# Altium PCB Sitara_Project_Rev_A_PCB.PcbDoc (part 6 of 9)
Units mm, origin at the board's own origin, x right, y up, seen from the top; angles counter-clockwise.
Board outline 120 x 85 mm, 8 copper layers (L1 (Sig), L2 (GND), L3 (PWR), L4 (Sig), L5 (GND), L6 (Sig), L7 (GND), L8 (Sig)), stack 1.188 mm thick; 458 components, 357 nets, 1916 pads, 1164 vias.
Unrouted connection lines stored in the file: 516.
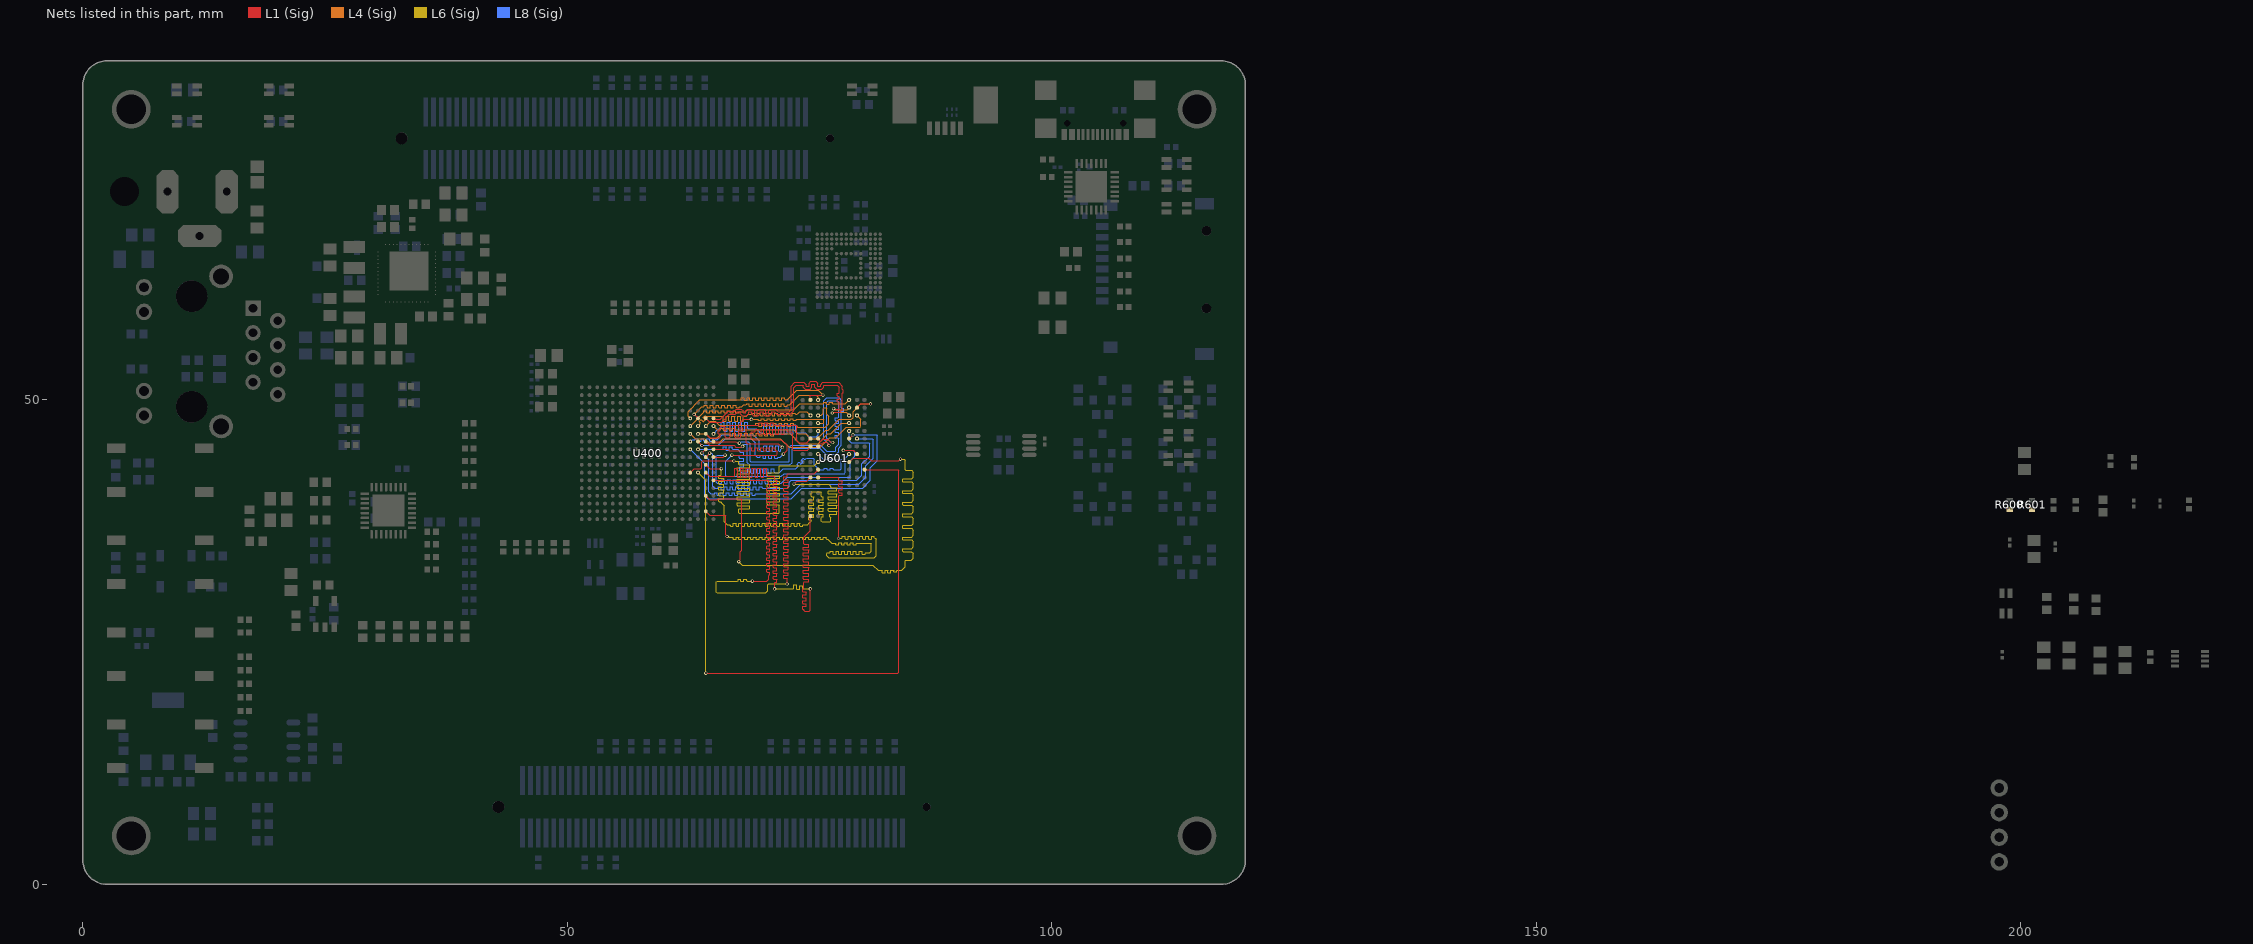
[diagram p9: the nets of this part, all layers, seen from the top]

## Via types
v1: diameter 0.35, hole 0.2, L1 (Sig) to L8 (Sig), tented both sides, 846 vias
v2: diameter 0.45, hole 0.3, L1 (Sig) to L8 (Sig), tented both sides, 302 vias
v3: diameter 0.45/0.45/0.45/0.45/0.45/0.45/0.45/0.45 (per signal layer), hole 0.3, L1 (Sig) to L8 (Sig), tented both sides, 16 vias

## Nets (pads, with @x,y where several pads share a name; then routed paths per layer and width w, separated by ;. In a path a pad name is that pad's centre, name@x,y a point inside that pad or via, vN(x,y) a via of type N, cw(c..) or ccw(c..) an arc to the next point about the centre after c; other vN are vias at no path point) (continued)
DDR_CK_P: U400.D2 U601.J7 | length 61.5
  L1 (Sig) w0.1: U400.D2@64.3,40.1 64.7,39.7 65.5,39.7 65.6,39.8 67.941,39.8 68,39.741 68,34.502 67.85,34.352 67.85,33.484 67.7,33.334 v1(67.7,33.3) ; U601.J7@79.1,43.6 79.5,44 81.1,44 81.362,43.738 84.22,43.738 84.371,43.889 v1(84.404,43.889)
  L6 (Sig) w0.1: v1(67.7,33.3) 68.052,32.948 81.552,32.948 82.093,32.407 82.1,32.4 82.443,32.4 82.502,32.341 82.502,32.168 82.517,32.153 82.787,32.153 82.802,32.168 82.802,32.39 82.817,32.405 83.087,32.405 83.102,32.39 83.102,32.168 83.117,32.153 83.387,32.153 83.402,32.168 83.402,32.39 83.417,32.405 83.687,32.405 83.702,32.39 83.702,32.257 83.717,32.242 83.987,32.242 84.002,32.257 84.002,32.341 84.061,32.4 84.526,32.4 84.55,32.424 84.9,32.774 84.9,33.1 84.9,33.389 84.959,33.447 85.524,33.447 85.715,33.638 85.715,34.157 85.524,34.347 84.665,34.347 84.65,34.362 84.65,34.632 84.665,34.647 85.548,34.647 85.739,34.838 85.739,35.357 85.548,35.547 84.665,35.547 84.65,35.562 84.65,35.832 84.665,35.847 85.548,35.847 85.739,36.038 85.739,36.557 85.548,36.747 84.665,36.747 84.65,36.762 84.65,37.032 84.665,37.047 85.548,37.047 85.739,37.238 85.739,37.757 85.548,37.947 84.665,37.947 84.65,37.962 84.65,38.232 84.665,38.247 85.548,38.247 85.739,38.438 85.739,38.957 85.548,39.147 84.665,39.147 84.65,39.162 84.65,39.432 84.665,39.447 85.548,39.447 85.739,39.638 85.739,40.157 85.548,40.347 84.665,40.347 84.65,40.362 84.65,40.632 84.665,40.647 85.548,40.647 85.739,40.838 85.739,41.357 85.548,41.547 84.665,41.547 84.65,41.562 84.65,41.832 84.665,41.847 85.548,41.847 85.739,42.038 85.739,42.557 85.548,42.747 84.959,42.747 84.9,42.806 84.9,42.944 84.9,43.777 84.789,43.889 v1(84.404,43.889)
DDR_CKE: R601.1 U400.G3 U601.K9 | length 65.3
  L1 (Sig) w0.1: v1(64.3,21.8) 84.1,21.8 84.2,21.9 84.2,42.741 84.141,42.8 U601.K9@80.7,42.8
  L6 (Sig) w0.1: v1(63.5,42.5) 64.3,41.7 v1(64.3,21.8)
DDR_DQ0: U400.M3 U601.D7 | length 20.7
  L4 (Sig) w0.1: v1(63.5,46.5) 64.3,46.5 64.767,46.033 65.433,46.033 65.9,46.5 66.4,46.5 66.75,46.5 66.809,46.441 66.809,46.322 66.824,46.307 67.094,46.307 67.109,46.322 67.109,46.534 67.124,46.549 67.394,46.549 67.409,46.534 67.409,46.322 67.424,46.307 67.694,46.307 67.709,46.322 67.709,46.534 67.724,46.549 67.994,46.549 68.009,46.534 68.009,46.322 68.024,46.307 68.294,46.307 68.309,46.322 68.309,46.534 68.324,46.549 68.594,46.549 68.609,46.534 68.609,46.322 68.624,46.307 68.894,46.307 68.909,46.322 68.909,46.534 68.924,46.549 69.194,46.549 69.209,46.534 69.209,46.322 69.224,46.307 69.494,46.307 69.509,46.322 69.509,46.534 69.524,46.549 69.794,46.549 69.809,46.534 69.809,46.322 69.824,46.307 70.094,46.307 70.109,46.322 70.109,46.534 70.124,46.549 70.394,46.549 70.409,46.534 70.409,46.322 70.424,46.307 70.694,46.307 70.709,46.322 70.709,46.534 70.724,46.549 70.994,46.549 71.009,46.534 71.009,46.322 71.024,46.307 71.294,46.307 71.309,46.322 71.309,46.441 71.367,46.5 71.614,46.5 73,46.5 74,45.5 75.9,45.5 76.9,46.5 77.2,46.5 78.3,47.6 v1(79.1,47.6)
DDR_DQ1: U400.M4 U601.C8 | length 20.7
  L4 (Sig) w0.1: v1(62.7,46.5) 63.2,46 64.2,46 64.6,45.6 65.7,45.6 66.1,46 72,46 72.9,45.1 76.1,45.1 77.1,46.1 77.7,46.1 78.8,47.2 80.241,47.2 80.3,47.259 80.3,48 v1(79.9,48.4)
DDR_DQ2: U400.N1 U601.B8 | length 21
  L1 (Sig) w0.1: U601.B8@79.9,49.2 80.3,49.6 v1(81.3,49.6)
  L4 (Sig) w0.1: v1(65.1,47.3) 65.5,46.9 65.7,46.9 65.75,46.9 65.809,46.959 65.809,47.043 65.824,47.058 66.094,47.058 66.109,47.043 66.109,46.901 66.124,46.886 66.394,46.886 66.409,46.901 66.409,47.043 66.424,47.058 66.694,47.058 66.709,47.043 66.709,46.901 66.724,46.886 66.994,46.886 67.009,46.901 67.009,47.043 67.024,47.058 67.294,47.058 67.309,47.043 67.309,46.959 67.367,46.9 67.914,46.9 73.4,46.9 73.8,46.5 74.6,46.5 75.1,46 75.806,46 76.67,46.864 76.923,46.864 78.059,48 79.333,48 79.5,48.167 79.5,48.8 80.3,49.6 v1(81.3,49.6)
DDR_DQ3: U400.N2 U601.C3 | length 20.8
  L4 (Sig) w0.1: v1(64.3,47.3) 64.8,47.8 65.3,47.8 65.7,47.4 69.358,47.4 69.408,47.4 69.467,47.459 69.467,47.588 69.482,47.603 69.752,47.603 69.767,47.588 69.767,47.272 69.782,47.257 70.052,47.257 70.067,47.272 70.067,47.588 70.082,47.603 70.352,47.603 70.367,47.588 70.367,47.272 70.382,47.257 70.652,47.257 70.667,47.272 70.667,47.588 70.682,47.603 70.952,47.603 70.967,47.588 70.967,47.272 70.982,47.257 71.252,47.257 71.267,47.272 71.267,47.588 71.282,47.603 71.552,47.603 71.567,47.588 71.567,47.272 71.582,47.257 71.852,47.257 71.867,47.272 71.867,47.588 71.882,47.603 72.152,47.603 72.167,47.588 72.167,47.272 72.182,47.257 72.452,47.257 72.467,47.272 72.467,47.588 72.482,47.603 72.752,47.603 72.767,47.588 72.767,47.272 72.782,47.257 73.052,47.257 73.067,47.272 73.067,47.588 73.082,47.603 73.352,47.603 73.367,47.588 73.367,47.459 73.425,47.4 73.597,47.4 73.6,47.4 73.8,47.2 76.648,47.2 77,47.552 77,48.3 76.8,48.5 76.8,49.141 76.741,49.2 76.5,49.2 76.4,49.1 76.4,48.6 76.2,48.4 v1(75.9,48.4)
DDR_DQ4: U400.N3 U601.C2 | length 20.7
  L4 (Sig) w0.1: v1(63.5,47.3) 63.7,47.5 63.735,47.535 63.735,47.618 63.611,47.743 63.611,47.764 63.802,47.955 63.823,47.955 64.019,47.759 64.04,47.759 64.231,47.95 64.231,47.971 64.035,48.167 64.035,48.188 64.226,48.379 64.247,48.379 64.372,48.255 64.455,48.255 64.5,48.3 64.509,48.3 65.682,48.3 66.032,48.3 66.09,48.241 66.09,47.834 66.105,47.819 66.375,47.819 66.39,47.834 66.39,48.287 66.405,48.302 66.675,48.302 66.69,48.287 66.69,47.834 66.705,47.819 66.975,47.819 66.99,47.834 66.99,48.287 67.005,48.302 67.275,48.302 67.29,48.287 67.29,47.834 67.305,47.819 67.575,47.819 67.59,47.834 67.59,48.287 67.605,48.302 67.875,48.302 67.89,48.287 67.89,47.834 67.905,47.819 68.175,47.819 68.19,47.834 68.19,48.241 68.249,48.3 68.427,48.3 68.5,48.3 68.7,48.5 68.927,48.5 68.977,48.5 69.036,48.559 69.036,48.63 69.051,48.645 69.321,48.645 69.336,48.63 69.336,48.393 69.351,48.378 69.621,48.378 69.636,48.393 69.636,48.63 69.651,48.645 69.921,48.645 69.936,48.63 69.936,48.393 69.951,48.378 70.221,48.378 70.236,48.393 70.236,48.63 70.251,48.645 70.521,48.645 70.536,48.63 70.536,48.393 70.551,48.378 70.821,48.378 70.836,48.393 70.836,48.63 70.851,48.645 71.121,48.645 71.136,48.63 71.136,48.393 71.151,48.378 71.421,48.378 71.436,48.393 71.436,48.63 71.451,48.645 71.721,48.645 71.736,48.63 71.736,48.393 71.751,48.378 72.021,48.378 72.036,48.393 72.036,48.63 72.051,48.645 72.321,48.645 72.336,48.63 72.336,48.393 72.351,48.378 72.621,48.378 72.636,48.393 72.636,48.63 72.651,48.645 72.921,48.645 72.936,48.63 72.936,48.393 72.951,48.378 73.221,48.378 73.236,48.393 73.236,48.63 73.251,48.645 73.521,48.645 73.536,48.63 73.536,48.559 73.594,48.5 73.7,48.5 73.77,48.57 74,48.8 74.7,48.8 v1(75.1,48.4)
DDR_DQ5: U400.N4 U601.A7 | length 20.6
  L4 (Sig) w0.1: v1(62.7,47.3) 64.06,48.66 64.11,48.71 64.11,48.871 64.125,48.886 64.395,48.886 64.41,48.871 64.41,48.669 64.425,48.654 64.695,48.654 64.71,48.669 64.71,48.871 64.725,48.886 64.995,48.886 65.01,48.871 65.01,48.669 65.025,48.654 65.295,48.654 65.31,48.669 65.31,48.871 65.325,48.886 65.595,48.886 65.61,48.871 65.61,48.669 65.625,48.654 65.895,48.654 65.91,48.669 65.91,48.871 65.925,48.886 66.195,48.886 66.21,48.871 66.21,48.669 66.225,48.654 66.495,48.654 66.51,48.669 66.51,48.871 66.525,48.886 66.795,48.886 66.81,48.871 66.81,48.669 66.825,48.654 67.095,48.654 67.11,48.669 67.11,48.871 67.125,48.886 67.395,48.886 67.41,48.871 67.41,48.669 67.425,48.654 67.695,48.654 67.71,48.669 67.71,48.741 67.769,48.8 67.921,48.8 68.4,48.8 68.6,49 73.4,49 74,49.6 76.35,49.6 76.4,49.6 76.459,49.659 76.459,49.729 76.474,49.744 76.744,49.744 76.759,49.729 76.759,49.579 76.774,49.564 77.044,49.564 77.059,49.579 77.059,49.729 77.074,49.744 77.344,49.744 77.359,49.729 77.359,49.659 77.417,49.6 77.582,49.6 78.7,49.6 v1(79.1,50)
DDR_DQ6: U400.P3 U601.A3 | length 20.7
  L1 (Sig) w0.1: v1(63.1,48.5) U400.P3@63.5,48.1
  L4 (Sig) w0.1: v1(63.1,48.5) 63.9,49.3 64.05,49.3 64.1,49.3 64.158,49.359 64.158,49.448 64.173,49.463 64.443,49.463 64.458,49.448 64.458,49.219 64.473,49.204 64.743,49.204 64.758,49.219 64.758,49.448 64.773,49.463 65.043,49.463 65.058,49.448 65.058,49.219 65.073,49.204 65.343,49.204 65.358,49.219 65.358,49.448 65.373,49.463 65.643,49.463 65.658,49.448 65.658,49.219 65.673,49.204 65.943,49.204 65.958,49.219 65.958,49.448 65.973,49.463 66.243,49.463 66.258,49.448 66.258,49.219 66.273,49.204 66.543,49.204 66.558,49.219 66.558,49.448 66.573,49.463 66.843,49.463 66.858,49.448 66.858,49.219 66.873,49.204 67.143,49.204 67.158,49.219 67.158,49.448 67.173,49.463 67.443,49.463 67.458,49.448 67.458,49.219 67.473,49.204 67.743,49.204 67.758,49.219 67.758,49.241 67.817,49.3 67.923,49.3 68,49.3 68.2,49.5 68.4,49.5 68.45,49.5 68.509,49.559 68.509,49.595 68.524,49.61 68.794,49.61 68.809,49.595 68.809,49.364 68.824,49.349 69.094,49.349 69.109,49.364 69.109,49.595 69.124,49.61 69.394,49.61 69.409,49.595 69.409,49.364 69.424,49.349 69.694,49.349 69.709,49.364 69.709,49.595 69.724,49.61 69.994,49.61 70.009,49.595 70.009,49.364 70.024,49.349 70.294,49.349 70.309,49.364 70.309,49.595 70.324,49.61 70.594,49.61 70.609,49.595 70.609,49.364 70.624,49.349 70.894,49.349 70.909,49.364 70.909,49.595 70.924,49.61 71.194,49.61 71.209,49.595 71.209,49.364 71.224,49.349 71.494,49.349 71.509,49.364 71.509,49.595 71.524,49.61 71.794,49.61 71.809,49.595 71.809,49.364 71.824,49.349 72.094,49.349 72.109,49.364 72.109,49.595 72.124,49.61 72.394,49.61 72.409,49.595 72.409,49.364 72.424,49.349 72.694,49.349 72.709,49.364 72.709,49.441 72.767,49.5 72.951,49.5 73.951,50.5 75.7,50.5 75.9,50.3 v1(75.9,50)
DDR_DQ7: U400.P4 U601.A2 | length 21.1
  L1 (Sig) w0.1: U601.A2@75.1,50 75.1,50.441 75.159,50.5 v1(76.4,50.5)
  L4 (Sig) w0.1: v1(62.7,48.1) 62.5,48.3 62.5,48.8 63.7,50 67.849,50 67.899,50 67.958,50.059 67.958,50.2 67.973,50.215 68.243,50.215 68.258,50.2 68.258,49.984 68.273,49.969 68.543,49.969 68.558,49.984 68.558,50.2 68.573,50.215 68.843,50.215 68.858,50.2 68.858,49.984 68.873,49.969 69.143,49.969 69.158,49.984 69.158,50.2 69.173,50.215 69.443,50.215 69.458,50.2 69.458,49.984 69.473,49.969 69.743,49.969 69.758,49.984 69.758,50.2 69.773,50.215 70.043,50.215 70.058,50.2 70.058,49.984 70.073,49.969 70.343,49.969 70.358,49.984 70.358,50.2 70.373,50.215 70.643,50.215 70.658,50.2 70.658,49.984 70.673,49.969 70.943,49.969 70.958,49.984 70.958,50.2 70.973,50.215 71.243,50.215 71.258,50.2 71.258,49.984 71.273,49.969 71.543,49.969 71.558,49.984 71.558,50.2 71.573,50.215 71.843,50.215 71.858,50.2 71.858,49.984 71.873,49.969 72.143,49.969 72.158,49.984 72.158,50.2 72.173,50.215 72.443,50.215 72.458,50.2 72.458,50.059 72.516,50 72.682,50 72.7,50 73.7,51 75.9,51 v1(76.4,50.5)
DDR_DQ8: U400.J1 U601.H8 | length 31.6
  L1 (Sig) w0.1: U400.J1@65.1,44.1 66.1,44.1 v1(66.3,44.3) ; v1(78.5,44.8) 79.5,44.8 U601.H8@79.9,44.4
  L8 (Sig) w0.1: v1(66.3,44.3) 65.459,44.3 65.4,44.241 65.4,41.5 65.5,41.4 65.605,41.4 65.882,41.4 65.941,41.459 65.941,41.721 65.956,41.736 66.226,41.736 66.241,41.721 66.241,41.378 66.256,41.363 66.526,41.363 66.541,41.378 66.541,41.721 66.556,41.736 66.826,41.736 66.841,41.721 66.841,41.378 66.856,41.363 67.126,41.363 67.141,41.378 67.141,41.721 67.156,41.736 67.426,41.736 67.441,41.721 67.441,41.378 67.456,41.363 67.726,41.363 67.741,41.378 67.741,41.721 67.756,41.736 68.026,41.736 68.041,41.721 68.041,41.378 68.056,41.363 68.326,41.363 68.341,41.378 68.341,41.721 68.356,41.736 68.626,41.736 68.641,41.721 68.641,41.378 68.656,41.363 68.926,41.363 68.941,41.378 68.941,41.721 68.956,41.736 69.226,41.736 69.241,41.721 69.241,41.378 69.256,41.363 69.526,41.363 69.541,41.378 69.541,41.721 69.556,41.736 69.826,41.736 69.841,41.721 69.841,41.378 69.856,41.363 70.126,41.363 70.141,41.378 70.141,41.721 70.156,41.736 70.426,41.736 70.441,41.721 70.441,41.378 70.456,41.363 70.726,41.363 70.741,41.378 70.741,41.721 70.756,41.736 71.026,41.736 71.041,41.721 71.041,41.378 71.056,41.363 71.326,41.363 71.341,41.378 71.341,41.721 71.356,41.736 71.626,41.736 71.641,41.721 71.641,41.459 71.699,41.4 72.049,41.4 72.1,41.4 72.7,42 79.141,42 79.2,42.059 79.2,43.7 79.7,44.2 79.7,44.6 79.5,44.8 v1(78.5,44.8)
DDR_DQ9: U400.K1 U601.H7 | length 31.3
  L1 (Sig) w0.1: U400.K1@65.1,44.9 66.6,44.9 66.737,44.763 68.658,44.763 68.708,44.763 68.766,44.822 68.766,45.031 68.781,45.046 69.051,45.046 69.066,45.031 69.066,44.776 69.081,44.761 69.351,44.761 69.366,44.776 69.366,45.031 69.381,45.046 69.651,45.046 69.666,45.031 69.666,44.776 69.681,44.761 69.951,44.761 69.966,44.776 69.966,45.031 69.981,45.046 70.251,45.046 70.266,45.031 70.266,44.776 70.281,44.761 70.551,44.761 70.566,44.776 70.566,45.031 70.581,45.046 70.851,45.046 70.866,45.031 70.866,44.776 70.881,44.761 71.151,44.761 71.166,44.776 71.166,45.031 71.181,45.046 71.451,45.046 71.466,45.031 71.466,44.822 71.525,44.763 71.615,44.763 71.62,44.763 71.678,44.705 71.678,44.378 71.6,44.3 v1(67,44.3)
  L8 (Sig) w0.1: v1(67,44.3) 66.361,43.661 66.361,42.159 66.42,42.1 72.1,42.1 72.4,42.4 78.641,42.4 78.7,42.459 78.7,44 v1(79.1,44.4)
DDR_DQ10: U400.K2 U601.F8 | length 31.5
  L1 (Sig) w0.1: v1(63.9,44.5) U400.K2@64.3,44.9
  L8 (Sig) w0.1: v1(63.9,44.5) 64.6,43.8 64.6,40.5 64.8,40.3 65.1,40.3 65.15,40.3 65.209,40.359 65.209,40.408 65.224,40.423 65.494,40.423 65.509,40.408 65.509,40.15 65.524,40.135 65.794,40.135 65.809,40.15 65.809,40.408 65.824,40.423 66.094,40.423 66.109,40.408 66.109,40.15 66.124,40.135 66.394,40.135 66.409,40.15 66.409,40.408 66.424,40.423 66.694,40.423 66.709,40.408 66.709,40.15 66.724,40.135 66.994,40.135 67.009,40.15 67.009,40.408 67.024,40.423 67.294,40.423 67.309,40.408 67.309,40.15 67.324,40.135 67.594,40.135 67.609,40.15 67.609,40.408 67.624,40.423 67.894,40.423 67.909,40.408 67.909,40.15 67.924,40.135 68.194,40.135 68.209,40.15 68.209,40.408 68.224,40.423 68.494,40.423 68.509,40.408 68.509,40.15 68.524,40.135 68.794,40.135 68.809,40.15 68.809,40.408 68.824,40.423 69.094,40.423 69.109,40.408 69.109,40.15 69.124,40.135 69.394,40.135 69.409,40.15 69.409,40.241 69.467,40.3 69.781,40.3 73.1,40.3 74.1,41.3 80.1,41.3 80.8,42 80.8,43.2 81.6,44 81.6,45.9 81.5,46 v1(79.9,46)
DDR_DQ11: U400.K3 U601.H3 | length 31.5
  L8 (Sig) w0.1: v1(63.5,44.9) 66,44.9 66.05,44.9 66.109,44.959 66.109,45.135 66.124,45.15 66.394,45.15 66.409,45.135 66.409,44.823 66.424,44.808 66.694,44.808 66.709,44.823 66.709,45.135 66.724,45.15 66.994,45.15 67.009,45.135 67.009,44.959 67.067,44.9 67.398,44.9 67.6,44.9 67.8,44.7 67.8,44.65 67.859,44.591 68.227,44.591 68.242,44.576 68.242,44.306 68.227,44.291 67.75,44.291 67.735,44.276 67.735,44.006 67.75,43.991 68.227,43.991 68.242,43.976 68.242,43.706 68.227,43.691 67.75,43.691 67.735,43.676 67.735,43.406 67.75,43.391 68.227,43.391 68.242,43.376 68.242,43.106 68.227,43.091 67.859,43.091 67.8,43.033 67.8,42.733 67.8,42.7 68,42.5 68.4,42.5 68.599,42.5 68.657,42.559 68.657,42.895 68.672,42.91 68.942,42.91 68.957,42.895 68.957,42.461 68.972,42.446 69.242,42.446 69.257,42.461 69.257,42.895 69.272,42.91 69.542,42.91 69.557,42.895 69.557,42.461 69.572,42.446 69.842,42.446 69.857,42.461 69.857,42.895 69.872,42.91 70.142,42.91 70.157,42.895 70.157,42.461 70.172,42.446 70.442,42.446 70.457,42.461 70.457,42.895 70.472,42.91 70.742,42.91 70.757,42.895 70.757,42.461 70.772,42.446 71.042,42.446 71.057,42.461 71.057,42.895 71.072,42.91 71.342,42.91 71.357,42.895 71.357,42.559 71.416,42.5 71.766,42.5 71.9,42.5 72.3,42.9 73.6,42.9 73.8,43.1 73.835,43.135 73.835,43.218 73.724,43.329 73.724,43.35 73.915,43.541 73.936,43.541 74.098,43.38 74.12,43.38 74.31,43.57 74.31,43.592 74.149,43.753 74.149,43.775 74.34,43.966 74.361,43.966 74.472,43.855 74.555,43.855 74.642,43.942 74.7,44 75.4,44 75.5,43.9 75.5,43.3 76,42.8 76.44,42.8 76.49,42.8 76.548,42.859 76.548,42.93 76.563,42.945 76.833,42.945 76.848,42.93 76.848,42.802 76.863,42.787 77.133,42.787 77.148,42.802 77.148,42.93 77.163,42.945 77.433,42.945 77.448,42.93 77.448,42.859 77.507,42.8 78.133,42.8 78.2,42.8 78.3,42.9 78.3,43.841 78.241,43.9 76.4,43.9 v1(75.9,44.4)
DDR_DQ12: U400.K4 U601.F7 | length 31.5
  L1 (Sig) w0.1: U601.F7@79.1,46 v1(79.5,46.4)
  L8 (Sig) w0.1: v1(62.7,44.9) 64.2,43.4 64.2,40.1 64.5,39.8 73.1,39.8 74.2,40.9 80.5,40.9 81.3,41.7 81.3,43 82,43.7 82,46.341 81.941,46.4 v1(79.5,46.4)
DDR_DQ13: U400.L3 U601.G2 | length 31.7
  L1 (Sig) w0.1: U400.L3@63.5,45.7 v1(63.9,45.3) ; v1(72.3,44.4) 72.7,44.8 72.7,45.3 72.1,45.9 69.1,45.9 69,46 69,46.641 69.059,46.7 69.3,46.7 69.35,46.7 69.409,46.759 69.409,46.935 69.424,46.95 69.694,46.95 69.709,46.935 69.709,46.465 69.724,46.45 69.994,46.45 70.009,46.465 70.009,46.935 70.024,46.95 70.294,46.95 70.309,46.935 70.309,46.465 70.324,46.45 70.594,46.45 70.609,46.465 70.609,46.935 70.624,46.95 70.894,46.95 70.909,46.935 70.909,46.465 70.924,46.45 71.194,46.45 71.209,46.465 71.209,46.935 71.224,46.95 71.494,46.95 71.509,46.935 71.509,46.465 71.524,46.45 71.794,46.45 71.809,46.465 71.809,46.935 71.824,46.95 72.094,46.95 72.109,46.935 72.109,46.465 72.124,46.45 72.394,46.45 72.409,46.465 72.409,46.935 72.424,46.95 72.694,46.95 72.709,46.935 72.709,46.759 72.767,46.7 72.834,46.7 73.1,46.7 73.3,46.5 73.3,44.859 73.359,44.8 74.8,44.8 74.895,44.895 74.895,44.906 75.1,45.111 U601.G2@75.1,45.2
  L8 (Sig) w0.1: v1(63.9,45.3) 65.6,45.3 66.3,46 69,46 69.4,45.6 69.4,44.3 69.6,44.1 69.8,44.1 69.85,44.1 69.909,44.159 69.909,44.281 69.924,44.296 70.194,44.296 70.209,44.281 70.209,43.997 70.224,43.982 70.494,43.982 70.509,43.997 70.509,44.281 70.524,44.296 70.794,44.296 70.809,44.281 70.809,43.997 70.824,43.982 71.094,43.982 71.109,43.997 71.109,44.281 71.124,44.296 71.394,44.296 71.409,44.281 71.409,43.997 71.424,43.982 71.694,43.982 71.709,43.997 71.709,44.041 71.767,44.1 72,44.1 v1(72.3,44.4)
DDR_DQ14: U400.L4 U601.F2 | length 31.6
  L1 (Sig) w0.1: v1(72.2,45.1) 72.184,45.1 71.784,45.5 68.6,45.5 68.5,45.6 68.5,47.341 68.559,47.4 69.7,47.4 69.75,47.4 69.809,47.459 69.809,47.635 69.824,47.65 70.094,47.65 70.109,47.635 70.109,47.383 70.124,47.368 70.394,47.368 70.409,47.383 70.409,47.635 70.424,47.65 70.694,47.65 70.709,47.635 70.709,47.383 70.724,47.368 70.994,47.368 71.009,47.383 71.009,47.635 71.024,47.65 71.294,47.65 71.309,47.635 71.309,47.459 71.367,47.4 71.909,47.4 73.641,47.4 73.7,47.341 73.7,45.8 73.9,45.6 74.7,45.6 U601.F2@75.1,46
  L8 (Sig) w0.1: v1(62.7,45.7) 62.9,45.9 63.1,45.9 63.15,45.9 63.209,45.959 63.209,45.992 63.224,46.007 63.494,46.007 63.509,45.992 63.509,45.772 63.524,45.757 63.794,45.757 63.809,45.772 63.809,45.992 63.824,46.007 64.094,46.007 64.109,45.992 64.109,45.772 64.124,45.757 64.394,45.757 64.409,45.772 64.409,45.992 64.424,46.007 64.694,46.007 64.709,45.992 64.709,45.772 64.724,45.757 64.994,45.757 65.009,45.772 65.009,45.992 65.024,46.007 65.294,46.007 65.309,45.992 65.309,45.959 65.367,45.9 65.5,45.9 66,46.4 69.2,46.4 69.8,45.8 69.8,44.9 70,44.7 70.2,44.7 70.25,44.7 70.309,44.759 70.309,45.233 70.324,45.248 70.594,45.248 70.609,45.233 70.609,44.692 70.624,44.677 70.894,44.677 70.909,44.692 70.909,45.233 70.924,45.248 71.194,45.248 71.209,45.233 71.209,44.692 71.224,44.677 71.494,44.677 71.509,44.692 71.509,45.233 71.524,45.248 71.794,45.248 71.809,45.233 71.809,44.759 71.867,44.7 71.992,44.7 72.051,44.759 72.051,44.883 72.2,45.032 v1(72.2,45.1)
DDR_DQ15: U400.M1 U601.E3 | length 31.4
  L8 (Sig) w0.1: v1(65.1,46.5) 65.6,47 65.8,47 65.85,47 65.909,47.059 65.909,47.675 65.924,47.69 66.194,47.69 66.209,47.675 66.209,46.765 66.224,46.75 66.494,46.75 66.509,46.765 66.509,47.675 66.524,47.69 66.794,47.69 66.809,47.675 66.809,46.765 66.824,46.75 67.094,46.75 67.109,46.765 67.109,47.675 67.124,47.69 67.394,47.69 67.409,47.675 67.409,46.765 67.424,46.75 67.694,46.75 67.709,46.765 67.709,47.675 67.724,47.69 67.994,47.69 68.009,47.675 68.009,46.765 68.024,46.75 68.294,46.75 68.309,46.765 68.309,47.675 68.324,47.69 68.594,47.69 68.609,47.675 68.609,47.059 68.667,47 68.742,47 69.5,47 69.9,46.6 70.2,46.6 70.25,46.6 70.309,46.659 70.309,47.437 70.324,47.452 70.594,47.452 70.609,47.437 70.609,46.525 70.624,46.51 70.894,46.51 70.909,46.525 70.909,47.437 70.924,47.452 71.194,47.452 71.209,47.437 71.209,46.525 71.224,46.51 71.494,46.51 71.509,46.525 71.509,47.437 71.524,47.452 71.794,47.452 71.809,47.437 71.809,46.525 71.824,46.51 72.094,46.51 72.109,46.525 72.109,47.437 72.124,47.452 72.394,47.452 72.409,47.437 72.409,46.525 72.424,46.51 72.694,46.51 72.709,46.525 72.709,47.437 72.724,47.452 72.994,47.452 73.009,47.437 73.009,46.525 73.024,46.51 73.294,46.51 73.309,46.525 73.309,47.437 73.324,47.452 73.594,47.452 73.609,47.437 73.609,46.659 73.667,46.6 73.81,46.6 74.549,46.6 74.949,46.2 75.7,46.2 75.9,46.4 v1(75.9,46.8)
DDR_DQM0: U400.M2 U601.D3 | length 22.8
  L1 (Sig) w0.1: U400.M2@64.3,46.5 64.7,46.1 65.7,46.1 65.8,46.2 65.8,46.4 65.8,46.45 65.741,46.509 65.596,46.509 65.581,46.524 65.581,46.794 65.596,46.809 65.741,46.809 65.8,46.867 65.8,47.2 65.9,47.3 66.2,47.3 66.3,47.2 66.3,46.2 66.4,46.1 66.7,46.1 66.8,46.2 66.8,47.341 66.859,47.4 67.241,47.4 67.3,47.341 67.3,46.2 67.4,46.1 67.8,46.1 67.9,46.2 67.9,46.41 67.9,46.46 67.841,46.518 67.723,46.518 67.708,46.533 67.708,46.803 67.723,46.818 68.09,46.818 68.105,46.833 68.105,47.103 68.09,47.118 67.723,47.118 67.708,47.133 67.708,47.403 67.723,47.418 67.841,47.418 67.9,47.477 67.9,47.553 67.9,47.7 68.2,48 v1(69,48)
  L4 (Sig) w0.1: v1(69,48) 69.332,48 69.682,48 69.74,47.941 69.74,47.915 69.755,47.9 70.025,47.9 70.04,47.915 70.04,48.05 70.055,48.065 70.325,48.065 70.34,48.05 70.34,47.915 70.355,47.9 70.625,47.9 70.64,47.915 70.64,48.05 70.655,48.065 70.925,48.065 70.94,48.05 70.94,47.915 70.955,47.9 71.225,47.9 71.24,47.915 71.24,48.05 71.255,48.065 71.525,48.065 71.54,48.05 71.54,47.915 71.555,47.9 71.825,47.9 71.84,47.915 71.84,48.05 71.855,48.065 72.125,48.065 72.14,48.05 72.14,47.915 72.155,47.9 72.425,47.9 72.44,47.915 72.44,48.05 72.455,48.065 72.725,48.065 72.74,48.05 72.74,47.915 72.755,47.9 73.025,47.9 73.04,47.915 73.04,48.05 73.055,48.065 73.325,48.065 73.34,48.05 73.34,47.915 73.355,47.9 73.625,47.9 73.64,47.915 73.64,47.941 73.699,48 73.793,48 76.441,48 76.5,47.941 76.5,47.659 76.441,47.6 v1(75.9,47.6)
DDR_DQM1: U400.J2 U601.E7 | length 31.4
  L1 (Sig) w0.1: U400.J2@64.3,44.1 v1(64.7,44.5)
  L8 (Sig) w0.1: v1(64.7,44.5) 64.718,44.482 64.941,44.482 65,44.423 65,41.1 65.2,40.9 65.5,40.9 65.55,40.9 65.609,40.959 65.609,41.016 65.624,41.031 65.894,41.031 65.909,41.016 65.909,40.747 65.924,40.732 66.194,40.732 66.209,40.747 66.209,41.016 66.224,41.031 66.494,41.031 66.509,41.016 66.509,40.747 66.524,40.732 66.794,40.732 66.809,40.747 66.809,41.016 66.824,41.031 67.094,41.031 67.109,41.016 67.109,40.747 67.124,40.732 67.394,40.732 67.409,40.747 67.409,41.016 67.424,41.031 67.694,41.031 67.709,41.016 67.709,40.747 67.724,40.732 67.994,40.732 68.009,40.747 68.009,41.016 68.024,41.031 68.294,41.031 68.309,41.016 68.309,40.747 68.324,40.732 68.594,40.732 68.609,40.747 68.609,41.016 68.624,41.031 68.894,41.031 68.909,41.016 68.909,40.747 68.924,40.732 69.194,40.732 69.209,40.747 69.209,41.016 69.224,41.031 69.494,41.031 69.509,41.016 69.509,40.747 69.524,40.732 69.794,40.732 69.809,40.747 69.809,41.016 69.824,41.031 70.094,41.031 70.109,41.016 70.109,40.959 70.167,40.9 70.497,40.9 72.7,40.9 72.9,41.1 72.9,41.5 73.1,41.7 79.9,41.7 80.4,42.2 80.4,43.4 81.2,44.2 81.2,45.5 81.1,45.6 79.3,45.6 79.1,45.8 v1(79.1,46.8)
DDR_DQS0_N: U400.P2 U601.B7 | length 25.1
  L1 (Sig) w0.1: U400.P2@64.3,48.1 64.694,47.706 65.924,47.706 66.727,48.508 67.061,48.508 67.069,48.5 67.07,48.504 67.325,48.504 67.555,48.734 67.555,48.743 67.57,48.758 67.84,48.758 67.855,48.743 67.855,48.575 68.041,48.389 68.553,48.389 68.739,48.575 68.739,48.743 68.754,48.758 69.024,48.758 69.039,48.743 69.039,48.575 69.225,48.389 69.737,48.389 69.923,48.575 69.923,48.743 69.938,48.758 70.208,48.758 70.223,48.743 70.223,48.575 70.409,48.389 70.921,48.389 71.107,48.575 71.107,48.743 71.122,48.758 71.392,48.758 71.407,48.743 71.407,48.734 71.637,48.504 71.966,48.504 71.97,48.5 72.228,48.5 73.024,48.5 73.4,48.876 73.4,51.276 73.561,51.436 73.624,51.5 74.299,51.5 74.357,51.441 74.357,51.305 74.548,51.115 75.066,51.115 75.257,51.305 75.257,51.6 75.272,51.615 75.542,51.615 75.557,51.6 75.557,51.305 75.748,51.115 76.266,51.115 76.457,51.305 76.457,51.441 76.516,51.5 77.473,51.5 77.876,51.5 78.071,51.305 78.071,51.1 78.071,50.75 78.012,50.691 77.907,50.691 77.892,50.676 77.892,50.406 77.907,50.391 78.059,50.391 78.074,50.376 78.074,50.106 78.059,50.091 77.907,50.091 77.892,50.076 77.892,49.806 77.907,49.791 78.012,49.791 78.071,49.733 78.071,49.635 78.071,49.088 78.012,49.03 77.684,49.03 77.661,49.052 77.548,49.052 v1(77.5,49.1)
  L4 (Sig) w0.1: v1(77.5,49.1) 77.568,49.1 77.661,49.007 78.907,49.007 v1(79.1,49.2)
DDR_DQS0_P: U400.P1 U601.C7 | length 25.1
  L1 (Sig) w0.1: U400.P1@65.1,48.1 65.181,48.1 65.283,47.998 65.803,47.998 66.424,48.619 66.424,48.624 66.517,48.717 66.604,48.804 67.065,48.804 67.069,48.8 67.187,48.8 67.191,48.796 67.204,48.796 67.263,48.855 67.263,48.864 67.449,49.05 67.961,49.05 68.147,48.864 68.147,48.696 68.162,48.681 68.432,48.681 68.447,48.696 68.447,48.864 68.633,49.05 69.145,49.05 69.331,48.864 69.331,48.696 69.346,48.681 69.616,48.681 69.631,48.696 69.631,48.864 69.817,49.05 70.329,49.05 70.515,48.864 70.515,48.696 70.53,48.681 70.8,48.681 70.815,48.696 70.815,48.864 71.001,49.05 71.513,49.05 71.699,48.864 71.699,48.855 71.758,48.796 71.966,48.796 71.97,48.8 72.228,48.8 72.9,48.8 73.1,49 73.1,51.4 73.5,51.8 73.561,51.8 74.423,51.8 74.657,51.566 74.657,51.43 74.672,51.415 74.942,51.415 74.957,51.43 74.957,51.724 75.148,51.915 75.666,51.915 75.857,51.724 75.857,51.43 75.872,51.415 76.142,51.415 76.157,51.43 76.157,51.566 76.391,51.8 77.473,51.8 78,51.8 78.371,51.429 78.371,51.2 78.371,51.117 78.429,51.059 78.47,51.059 78.485,51.044 78.485,50.774 78.47,50.759 78.429,50.759 78.371,50.7 78.371,50.35 78.371,48.964 78.136,48.73 77.503,48.73 77.42,48.647 v1(77.352,48.647)
  L4 (Sig) w0.1: v1(77.352,48.647) 77.4,48.694 77.523,48.694 77.536,48.707 78.793,48.707 v1(79.1,48.4)
DDR_DQS1_N: U400.L2 U601.G3 | length 32.2
  L1 (Sig) w0.1: U400.L2@64.3,45.7 64.3,45.686 64.686,45.3 67.223,45.3 67.386,45.138 67.97,45.138 67.985,45.152 68.052,45.152 v1(68.1,45.2) ; U601.G3@75.9,45.2 75.9,45.267 76.083,45.45 76.29,45.45 76.492,45.652 76.786,45.652 76.952,45.486 76.952,45.348 v1(77,45.3)
  L8 (Sig) w0.1: v1(68.1,45.2) 68.1,45.223 68.277,45.4 68.559,45.4 68.6,45.359 68.6,43.534 68.834,43.3 72.99,43.3 73.224,43.534 73.224,44.983 73.266,45.024 76.051,45.024 76.669,44.407 77.778,44.407 78.012,44.641 78.012,45.007 78.3,45.295 78.3,48.433 78.3,48.783 78.359,48.842 78.535,48.842 78.55,48.857 78.55,49.127 78.535,49.142 78.359,49.142 78.3,49.201 78.3,49.7 78.3,49.966 78.066,50.2 76.8,50.2 76.5,49.9 76.5,45.938 76.952,45.486 76.952,45.348 v1(77,45.3)
DDR_DQS1_P: U400.L1 U601.F3 | length 32.1
  L1 (Sig) w0.1: U400.L1@65.1,45.7 67.389,45.7 67.527,45.561 67.739,45.561 v1(67.763,45.537) ; U601.F3@75.9,46 75.9,45.933 76.083,45.75 76.166,45.75 76.368,45.952 76.91,45.952 77.214,45.648 77.352,45.648 v1(77.4,45.6)
  L8 (Sig) w0.1: v1(67.763,45.537) 67.784,45.537 67.946,45.7 68.683,45.7 68.9,45.483 68.9,43.659 68.959,43.6 72.866,43.6 72.924,43.659 72.924,45.107 73.141,45.324 76.176,45.324 76.793,44.707 77.654,44.707 77.712,44.765 77.712,45.131 78,45.419 78,45.964 78,46.014 77.941,46.072 77.652,46.072 77.637,46.087 77.637,46.357 77.652,46.372 77.991,46.372 78.006,46.387 78.006,46.657 77.991,46.672 77.652,46.672 77.637,46.687 77.637,46.957 77.652,46.972 77.991,46.972 78.006,46.987 78.006,47.257 77.991,47.272 77.652,47.272 77.637,47.287 77.637,47.557 77.652,47.572 77.991,47.572 78.006,47.587 78.006,47.857 77.991,47.872 77.652,47.872 77.637,47.887 77.637,48.157 77.652,48.172 77.941,48.172 78,48.231 78,48.401 78,49.841 77.941,49.9 76.924,49.9 76.8,49.776 76.8,46.062 77.214,45.648 77.352,45.648 v1(77.4,45.6)
DDR_NCAS: U400.F1 U601.K3 | length 68.5
  L1 (Sig) w0.1: U400.F1@65.1,41.7 70.741,41.7 70.8,41.641 70.8,41.34 70.8,41.29 70.859,41.231 70.866,41.231 70.896,41.201 70.896,40.961 70.866,40.931 70.64,40.931 70.61,40.901 70.61,40.661 70.64,40.631 70.866,40.631 70.896,40.601 70.896,40.361 70.866,40.331 70.64,40.331 70.61,40.301 70.61,40.061 70.64,40.031 70.866,40.031 70.896,40.001 70.896,39.761 70.866,39.731 70.64,39.731 70.61,39.701 70.61,39.461 70.64,39.431 70.866,39.431 70.896,39.401 70.896,39.161 70.866,39.131 70.64,39.131 70.61,39.101 70.61,38.861 70.64,38.831 70.866,38.831 70.896,38.801 70.896,38.561 70.866,38.531 70.64,38.531 70.61,38.501 70.61,38.261 70.64,38.231 70.866,38.231 70.896,38.201 70.896,37.961 70.866,37.931 70.64,37.931 70.61,37.901 70.61,37.661 70.64,37.631 70.866,37.631 70.896,37.601 70.896,37.361 70.866,37.331 70.64,37.331 70.61,37.301 70.61,37.061 70.64,37.031 70.866,37.031 70.896,37.001 70.896,36.761 70.866,36.731 70.64,36.731 70.61,36.701 70.61,36.461 70.64,36.431 70.866,36.431 70.896,36.401 70.896,36.161 70.866,36.131 70.64,36.131 70.61,36.101 70.61,35.861 70.64,35.831 70.866,35.831 70.896,35.801 70.896,35.561 70.866,35.531 70.64,35.531 70.61,35.501 70.61,35.261 70.64,35.231 70.866,35.231 70.896,35.201 70.896,34.961 70.866,34.931 70.64,34.931 70.61,34.901 70.61,34.661 70.64,34.631 70.866,34.631 70.896,34.601 70.896,34.361 70.866,34.331 70.64,34.331 70.61,34.301 70.61,34.061 70.64,34.031 70.866,34.031 70.896,34.001 70.896,33.761 70.866,33.731 70.64,33.731 70.61,33.701 70.61,33.461 70.64,33.431 70.866,33.431 70.896,33.401 70.896,33.161 70.866,33.131 70.64,33.131 70.61,33.101 70.61,32.861 70.64,32.831 70.866,32.831 70.896,32.801 70.896,32.561 70.866,32.531 70.647,32.531 70.617,32.501 70.617,32.261 70.647,32.231 70.859,32.231 70.889,32.201 70.889,31.961 70.859,31.931 70.8,31.873 70.8,31.706 70.8,31.5 70.6,31.3 v1(69.1,31.3) ; v1(72.7,31) 72.7,31.475 72.7,31.525 72.641,31.584 72.371,31.584 72.341,31.614 72.341,31.854 72.371,31.884 72.77,31.884 72.8,31.914 72.8,32.154 72.77,32.184 72.371,32.184 72.341,32.214 72.341,32.454 72.371,32.484 72.77,32.484 72.8,32.514 72.8,32.754 72.77,32.784 72.371,32.784 72.341,32.814 72.341,33.054 72.371,33.084 72.77,33.084 72.8,33.114 72.8,33.354 72.77,33.384 72.371,33.384 72.341,33.414 72.341,33.654 72.371,33.684 72.77,33.684 72.8,33.714 72.8,33.954 72.77,33.984 72.371,33.984 72.341,34.014 72.341,34.254 72.371,34.284 72.77,34.284 72.8,34.314 72.8,34.554 72.77,34.584 72.371,34.584 72.341,34.614 72.341,34.854 72.371,34.884 72.77,34.884 72.8,34.914 72.8,35.154 72.77,35.184 72.371,35.184 72.341,35.214 72.341,35.454 72.371,35.484 72.77,35.484 72.8,35.514 72.8,35.754 72.77,35.784 72.371,35.784 72.341,35.814 72.341,36.054 72.371,36.084 72.77,36.084 72.8,36.114 72.8,36.354 72.77,36.384 72.371,36.384 72.341,36.414 72.341,36.654 72.371,36.684 72.77,36.684 72.8,36.714 72.8,36.954 72.77,36.984 72.371,36.984 72.341,37.014 72.341,37.254 72.371,37.284 72.77,37.284 72.8,37.314 72.8,37.554 72.77,37.584 72.371,37.584 72.341,37.614 72.341,37.854 72.371,37.884 72.77,37.884 72.8,37.914 72.8,38.154 72.77,38.184 72.371,38.184 72.341,38.214 72.341,38.454 72.371,38.484 72.77,38.484 72.8,38.514 72.8,38.754 72.77,38.784 72.371,38.784 72.341,38.814 72.341,39.054 72.371,39.084 72.77,39.084 72.8,39.114 72.8,39.354 72.77,39.384 72.371,39.384 72.341,39.414 72.341,39.654 72.371,39.684 72.77,39.684 72.8,39.714 72.8,39.954 72.77,39.984 72.371,39.984 72.341,40.014 72.341,40.254 72.371,40.284 72.77,40.284 72.8,40.314 72.8,40.554 72.77,40.584 72.371,40.584 72.341,40.614 72.341,40.854 72.371,40.884 72.77,40.884 72.8,40.914 72.8,41.154 72.77,41.184 72.371,41.184 72.341,41.214 72.341,41.454 72.371,41.484 72.77,41.484 72.8,41.514 72.8,41.754 72.77,41.784 72.371,41.784 72.341,41.814 72.341,42.054 72.371,42.084 72.641,42.084 72.7,42.142 72.7,42.341 72.705,42.346 72.759,42.4 75.5,42.4 U601.K3@75.9,42.8
  L6 (Sig) w0.1: v1(69.1,31.3) 68.84,31.3 68.586,31.3 68.528,31.359 68.528,31.477 68.513,31.492 68.243,31.492 68.228,31.477 68.228,31.308 68.213,31.293 67.943,31.293 67.928,31.308 67.928,31.477 67.913,31.492 67.643,31.492 67.628,31.477 67.628,31.359 67.569,31.3 67.519,31.3 65.459,31.3 65.4,31.241 65.4,30.159 65.459,30.1 70.5,30.1 70.7,30.3 70.7,30.9 70.8,31 v1(72.7,31)
DDR_NCS: U400.H2 U601.L2 | length 58.9
  L1 (Sig) w0.1: U400.H2@64.3,43.3 64.7,42.9 v1(65.9,42.9) ; v1(73.4,41.3) 73.7,41.6 74.7,41.6 U601.L2@75.1,42
  L6 (Sig) w0.1: v1(65.9,42.9) 65.9,42.5 65.9,42.267 65.841,42.209 65.68,42.209 65.65,42.179 65.65,41.939 65.68,41.909 66.12,41.909 66.15,41.879 66.15,41.639 66.12,41.609 65.68,41.609 65.65,41.579 65.65,41.339 65.68,41.309 66.12,41.309 66.15,41.279 66.15,41.039 66.12,41.009 65.68,41.009 65.65,40.979 65.65,40.739 65.68,40.709 66.12,40.709 66.15,40.679 66.15,40.439 66.12,40.409 65.68,40.409 65.65,40.379 65.65,40.139 65.68,40.109 66.12,40.109 66.15,40.079 66.15,39.839 66.12,39.809 65.68,39.809 65.65,39.779 65.65,39.539 65.68,39.509 65.841,39.509 65.9,39.45 65.9,39.4 66.2,39.1 66.2,37.4 66.5,37.1 66.766,37.1 66.825,37.041 66.825,37.014 66.855,36.984 67.095,36.984 67.125,37.014 67.125,37.216 67.155,37.246 67.395,37.246 67.425,37.216 67.425,37.014 67.455,36.984 67.695,36.984 67.725,37.014 67.725,37.216 67.755,37.246 67.995,37.246 68.025,37.216 68.025,37.014 68.055,36.984 68.295,36.984 68.325,37.014 68.325,37.216 68.355,37.246 68.595,37.246 68.625,37.216 68.625,37.014 68.655,36.984 68.895,36.984 68.925,37.014 68.925,37.216 68.955,37.246 69.195,37.246 69.225,37.216 69.225,37.014 69.255,36.984 69.495,36.984 69.525,37.014 69.525,37.216 69.555,37.246 69.795,37.246 69.825,37.216 69.825,37.014 69.855,36.984 70.095,36.984 70.125,37.014 70.125,37.216 70.155,37.246 70.395,37.246 70.425,37.216 70.425,37.014 70.455,36.984 70.695,36.984 70.725,37.014 70.725,37.216 70.755,37.246 70.995,37.246 71.025,37.216 71.025,37.014 71.055,36.984 71.295,36.984 71.325,37.014 71.325,37.216 71.355,37.246 71.595,37.246 71.625,37.216 71.625,37.014 71.655,36.984 71.895,36.984 71.925,37.014 71.925,37.216 71.955,37.246 72.195,37.246 72.225,37.216 72.225,37.014 72.255,36.984 72.495,36.984 72.525,37.014 72.525,37.216 72.555,37.246 72.795,37.246 72.825,37.216 72.825,37.014 72.855,36.984 73.095,36.984 73.125,37.014 73.125,37.216 73.155,37.246 73.395,37.246 73.425,37.216 73.425,37.014 73.455,36.984 73.695,36.984 73.725,37.014 73.725,37.216 73.755,37.246 73.995,37.246 74.025,37.216 74.025,37.014 74.055,36.984 74.295,36.984 74.325,37.014 74.325,37.041 74.383,37.1 74.433,37.1 74.8,37.1 75,37.3 75.2,37.5 75.2,37.55 75.141,37.609 74.98,37.609 74.95,37.639 74.95,37.879 74.98,37.909 75.42,37.909 75.45,37.939 75.45,38.179 75.42,38.209 74.98,38.209 74.95,38.239 74.95,38.479 74.98,38.509 75.42,38.509 75.45,38.539 75.45,38.779 75.42,38.809 74.98,38.809 74.95,38.839 74.95,39.079 74.98,39.109 75.42,39.109 75.45,39.139 75.45,39.379 75.42,39.409 74.98,39.409 74.95,39.439 74.95,39.679 74.98,39.709 75.42,39.709 75.45,39.739 75.45,39.979 75.42,40.009 75.259,40.009 75.2,40.067 75.2,40.235 75.2,40.441 75.259,40.5 76.141,40.5 76.2,40.441 76.2,40.127 76.2,40.077 76.259,40.018 76.42,40.018 76.45,39.988 76.45,39.748 76.42,39.718 75.98,39.718 75.95,39.688 75.95,39.448 75.98,39.418 76.42,39.418 76.45,39.388 76.45,39.148 76.42,39.118 75.98,39.118 75.95,39.088 75.95,38.848 75.98,38.818 76.42,38.818 76.45,38.788 76.45,38.548 76.42,38.518 75.98,38.518 75.95,38.488 75.95,38.248 75.98,38.218 76.42,38.218 76.45,38.188 76.45,37.948 76.42,37.918 76.259,37.918 76.2,37.86 76.2,37.591 76.2,37.5 76.3,37.4 77.1,37.4 77.189,37.489 77.2,37.5 77.2,37.852 77.141,37.91 77.133,37.91 77.103,37.94 77.103,38.18 77.133,38.21 77.811,38.21 77.841,38.24 77.841,38.48 77.811,38.51 76.98,38.51 76.95,38.54 76.95,38.78 76.98,38.81 77.811,38.81 77.841,38.84 77.841,39.08 77.811,39.11 76.98,39.11 76.95,39.14 76.95,39.38 76.98,39.41 77.811,39.41 77.841,39.44 77.841,39.68 77.811,39.71 76.98,39.71 76.95,39.74 76.95,39.98 76.98,40.01 77.811,40.01 77.841,40.04 77.841,40.28 77.811,40.31 76.98,40.31 76.95,40.34 76.95,40.58 76.98,40.61 77.811,40.61 77.841,40.64 77.841,40.88 77.811,40.91 77.259,40.91 77.2,40.969 77.2,41.019 77.2,41.1 77,41.3 v1(73.4,41.3)
DDR_NRAS: U400.G4 U601.J3 | length 59
  L1 (Sig) w0.1: U400.G4@62.7,42.5 63.1,42.9 63.8,42.9 63.9,43 63.9,43.6 64,43.7 v1(67.2,43.7)
  L6 (Sig) w0.1: v1(67.2,43.7) 67.218,43.682 67.641,43.682 67.7,43.623 67.7,43.4 67.7,43.35 67.759,43.291 68.806,43.291 68.836,43.261 68.836,43.021 68.806,42.991 67.564,42.991 67.534,42.961 67.534,42.721 67.564,42.691 68.806,42.691 68.836,42.661 68.836,42.421 68.806,42.391 67.564,42.391 67.534,42.361 67.534,42.121 67.564,42.091 68.806,42.091 68.836,42.061 68.836,41.821 68.806,41.791 67.564,41.791 67.534,41.761 67.534,41.521 67.564,41.491 68.806,41.491 68.836,41.461 68.836,41.221 68.806,41.191 67.564,41.191 67.534,41.161 67.534,40.921 67.564,40.891 68.806,40.891 68.836,40.861 68.836,40.621 68.806,40.591 67.564,40.591 67.534,40.561 67.534,40.321 67.564,40.291 68.806,40.291 68.836,40.261 68.836,40.021 68.806,39.991 67.564,39.991 67.534,39.961 67.534,39.721 67.564,39.691 68.806,39.691 68.836,39.661 68.836,39.421 68.806,39.391 67.564,39.391 67.534,39.361 67.534,39.121 67.564,39.091 68.806,39.091 68.836,39.061 68.836,38.821 68.806,38.791 67.759,38.791 67.7,38.733 67.7,38.4 67.7,38.359 67.759,38.3 71.841,38.3 71.9,38.359 71.9,38.666 71.9,39.133 71.841,39.191 70.68,39.191 70.65,39.221 70.65,39.461 70.68,39.491 71.89,39.491 71.92,39.521 71.92,39.761 71.89,39.791 70.68,39.791 70.65,39.821 70.65,40.061 70.68,40.091 71.89,40.091 71.92,40.121 71.92,40.361 71.89,40.391 70.68,40.391 70.65,40.421 70.65,40.661 70.68,40.691 71.89,40.691 71.92,40.721 71.92,40.961 71.89,40.991 70.68,40.991 70.65,41.021 70.65,41.261 70.68,41.291 71.89,41.291 71.92,41.321 71.92,41.561 71.89,41.591 70.68,41.591 70.65,41.621 70.65,41.861 70.68,41.891 71.89,41.891 71.92,41.921 71.92,42.161 71.89,42.191 70.68,42.191 70.65,42.221 70.65,42.461 70.68,42.491 71.841,42.491 71.9,42.55 71.9,42.9 71.9,43.141 71.959,43.2 75.5,43.2 v1(75.9,43.6)
DDR_NRST: R600.1 U400.G2 U601.T2 | length 69.7
  L1 (Sig) w0.1: U400.G2@64.3,42.5 64.7,42.1 67.175,42.1 67.225,42.1 67.284,42.159 67.284,42.924 67.314,42.954 67.554,42.954 67.584,42.924 67.584,42.072 67.614,42.042 67.854,42.042 67.884,42.072 67.884,42.924 67.914,42.954 68.154,42.954 68.184,42.924 68.184,42.072 68.214,42.042 68.454,42.042 68.484,42.072 68.484,42.924 68.514,42.954 68.754,42.954 68.784,42.924 68.784,42.072 68.814,42.042 69.054,42.042 69.084,42.072 69.084,42.924 69.114,42.954 69.354,42.954 69.384,42.924 69.384,42.072 69.414,42.042 69.654,42.042 69.684,42.072 69.684,42.924 69.714,42.954 69.954,42.954 69.984,42.924 69.984,42.072 70.014,42.042 70.254,42.042 70.284,42.072 70.284,42.924 70.314,42.954 70.554,42.954 70.584,42.924 70.584,42.159 70.642,42.1 71.099,42.1 71.3,42.1 71.4,42 71.4,41.8 71.4,41.75 71.459,41.691 71.62,41.691 71.65,41.661 71.65,41.421 71.62,41.391 71.301,41.391 71.271,41.361 71.271,41.121 71.301,41.091 71.62,41.091 71.65,41.061 71.65,40.821 71.62,40.791 71.301,40.791 71.271,40.761 71.271,40.521 71.301,40.491 71.62,40.491 71.65,40.461 71.65,40.221 71.62,40.191 71.301,40.191 71.271,40.161 71.271,39.921 71.301,39.891 71.62,39.891 71.65,39.861 71.65,39.621 71.62,39.591 71.301,39.591 71.271,39.561 71.271,39.321 71.301,39.291 71.62,39.291 71.65,39.261 71.65,39.021 71.62,38.991 71.301,38.991 71.271,38.961 71.271,38.721 71.301,38.691 71.62,38.691 71.65,38.661 71.65,38.421 71.62,38.391 71.301,38.391 71.271,38.361 71.271,38.121 71.301,38.091 71.62,38.091 71.65,38.061 71.65,37.821 71.62,37.791 71.301,37.791 71.271,37.761 71.271,37.521 71.301,37.491 71.62,37.491 71.65,37.461 71.65,37.221 71.62,37.191 71.301,37.191 71.271,37.161 71.271,36.921 71.301,36.891 71.62,36.891 71.65,36.861 71.65,36.621 71.62,36.591 71.301,36.591 71.271,36.561 71.271,36.321 71.301,36.291 71.62,36.291 71.65,36.261 71.65,36.021 71.62,35.991 71.301,35.991 71.271,35.961 71.271,35.721 71.301,35.691 71.62,35.691 71.65,35.661 71.65,35.421 71.62,35.391 71.301,35.391 71.271,35.361 71.271,35.121 71.301,35.091 71.62,35.091 71.65,35.061 71.65,34.821 71.62,34.791 71.301,34.791 71.271,34.761 71.271,34.521 71.301,34.491 71.62,34.491 71.65,34.461 71.65,34.221 71.62,34.191 71.301,34.191 71.271,34.161 71.271,33.921 71.301,33.891 71.62,33.891 71.65,33.861 71.65,33.621 71.62,33.591 71.301,33.591 71.271,33.561 71.271,33.321 71.301,33.291 71.62,33.291 71.65,33.261 71.65,33.021 71.62,32.991 71.301,32.991 71.271,32.961 71.271,32.721 71.301,32.691 71.62,32.691 71.65,32.661 71.65,32.421 71.62,32.391 71.301,32.391 71.271,32.361 71.271,32.121 71.301,32.091 71.62,32.091 71.65,32.061 71.65,31.821 71.62,31.791 71.301,31.791 71.271,31.761 71.271,31.521 71.301,31.491 71.62,31.491 71.65,31.461 71.65,31.221 71.62,31.191 71.459,31.191 71.4,31.133 71.4,30.82 v1(71.4,30.5) ; v1(75.1,30.5) 75.1,28.3 75,28.2 74.5,28.2 74.429,28.271 74.4,28.3 74.4,28.321 74.341,28.38 74.302,28.38 74.287,28.395 74.287,28.665 74.302,28.68 74.635,28.68 74.65,28.695 74.65,28.965 74.635,28.98 74.302,28.98 74.287,28.995 74.287,29.265 74.302,29.28 74.635,29.28 74.65,29.295 74.65,29.565 74.635,29.58 74.302,29.58 74.287,29.595 74.287,29.865 74.302,29.88 74.635,29.88 74.65,29.895 74.65,30.165 74.635,30.18 74.302,30.18 74.287,30.195 74.287,30.465 74.302,30.48 74.341,30.48 74.4,30.538 74.4,30.803 74.4,31.153 74.459,31.212 74.929,31.212 74.944,31.227 74.944,31.497 74.929,31.512 74.357,31.512 74.342,31.527 74.342,31.797 74.357,31.812 74.929,31.812 74.944,31.827 74.944,32.097 74.929,32.112 74.357,32.112 74.342,32.127 74.342,32.397 74.357,32.412 74.929,32.412 74.944,32.427 74.944,32.697 74.929,32.712 74.357,32.712 74.342,32.727 74.342,32.997 74.357,33.012 74.929,33.012 74.944,33.027 74.944,33.297 74.929,33.312 74.357,33.312 74.342,33.327 74.342,33.597 74.357,33.612 74.929,33.612 74.944,33.627 74.944,33.897 74.929,33.912 74.357,33.912 74.342,33.927 74.342,34.197 74.357,34.212 74.929,34.212 74.944,34.227 74.944,34.497 74.929,34.512 74.357,34.512 74.342,34.527 74.342,34.797 74.357,34.812 74.929,34.812 74.944,34.827 74.944,35.097 74.929,35.112 74.459,35.112 74.4,35.17 74.4,35.787 74.4,35.8 75.1,36.5 U601.T2@75.1,38
  L6 (Sig) w0.1: v1(71.4,30.5) 73.291,30.5 73.341,30.5 73.4,30.559 73.4,30.922 73.415,30.937 73.685,30.937 73.7,30.922 73.7,30.478 73.715,30.463 73.985,30.463 74,30.478 74,30.815 74.015,30.83 74.285,30.83 74.3,30.815 74.3,30.559 74.359,30.5 74.816,30.5 v1(75.1,30.5)
DDR_NWE: U400.B2 U601.L3 | length 61
  L1 (Sig) w0.1: U400.B2@64.3,38.5 64.7,38.1 66.3,38.1 66.371,38.029 66.371,36.084 66.5,35.954 v1(66.5,35.9) ; U601.L3@75.9,42 77.9,42 78,41.9 78,41.748 78,41.698 78.059,41.639 78.375,41.639 78.405,41.609 78.405,41.369 78.375,41.339 78.029,41.339 77.999,41.309 77.999,41.069 78.029,41.039 78.375,41.039 78.405,41.009 78.405,40.769 78.375,40.739 78.029,40.739 77.999,40.709 77.999,40.469 78.029,40.439 78.375,40.439 78.405,40.409 78.405,40.169 78.375,40.139 78.059,40.139 78,40.081 78,39.8 v1(78,35.7)
  L6 (Sig) w0.1: v1(66.5,35.9) 66.548,35.852 66.657,35.852 66.709,35.8 66.716,35.8 67.066,35.8 67.124,35.741 67.124,35.63 67.154,35.6 67.394,35.6 67.424,35.63 67.424,35.793 67.454,35.823 67.694,35.823 67.724,35.793 67.724,35.63 67.754,35.6 67.994,35.6 68.024,35.63 68.024,35.793 68.054,35.823 68.294,35.823 68.324,35.793 68.324,35.63 68.354,35.6 68.594,35.6 68.624,35.63 68.624,35.793 68.654,35.823 68.894,35.823 68.924,35.793 68.924,35.63 68.954,35.6 69.194,35.6 69.224,35.63 69.224,35.793 69.254,35.823 69.494,35.823 69.524,35.793 69.524,35.63 69.554,35.6 69.794,35.6 69.824,35.63 69.824,35.793 69.854,35.823 70.094,35.823 70.124,35.793 70.124,35.63 70.154,35.6 70.394,35.6 70.424,35.63 70.424,35.793 70.454,35.823 70.694,35.823 70.724,35.793 70.724,35.63 70.754,35.6 70.994,35.6 71.024,35.63 71.024,35.793 71.054,35.823 71.294,35.823 71.324,35.793 71.324,35.63 71.354,35.6 71.594,35.6 71.624,35.63 71.624,35.793 71.654,35.823 71.894,35.823 71.924,35.793 71.924,35.63 71.954,35.6 72.194,35.6 72.224,35.63 72.224,35.793 72.254,35.823 72.494,35.823 72.524,35.793 72.524,35.63 72.554,35.6 72.794,35.6 72.824,35.63 72.824,35.793 72.854,35.823 73.094,35.823 73.124,35.793 73.124,35.63 73.154,35.6 73.394,35.6 73.424,35.63 73.424,35.793 73.454,35.823 73.694,35.823 73.724,35.793 73.724,35.63 73.754,35.6 73.994,35.6 74.024,35.63 74.024,35.793 74.054,35.823 74.294,35.823 74.324,35.793 74.324,35.63 74.354,35.6 74.594,35.6 74.624,35.63 74.624,35.793 74.654,35.823 74.894,35.823 74.924,35.793 74.924,35.63 74.954,35.6 75.194,35.6 75.224,35.63 75.224,35.793 75.254,35.823 75.494,35.823 75.524,35.793 75.524,35.63 75.554,35.6 75.794,35.6 75.824,35.63 75.824,35.793 75.854,35.823 76.094,35.823 76.124,35.793 76.124,35.63 76.154,35.6 76.394,35.6 76.424,35.63 76.424,35.793 76.454,35.823 76.694,35.823 76.724,35.793 76.724,35.659 76.783,35.6 76.85,35.6 76.9,35.6 77.3,35.2 77.309,35.2 77.659,35.2 77.718,35.141 77.718,35.069 77.748,35.039 77.988,35.039 78.018,35.069 78.018,35.226 78.048,35.256 78.288,35.256 78.318,35.226 78.318,35.069 78.348,35.039 78.588,35.039 78.618,35.069 78.618,35.226 78.648,35.256 78.888,35.256 78.918,35.226 78.918,35.069 78.948,35.039 79.188,35.039 79.218,35.069 79.218,35.226 79.248,35.256 79.488,35.256 79.518,35.226 79.518,35.069 79.548,35.039 79.788,35.039 79.818,35.069 79.818,35.141 79.876,35.2 80.49,35.2 81.341,35.2 81.4,35.141 81.4,34.4 81.2,34.2 80.85,34.2 80.8,34.2 80.741,34.141 80.741,34.091 80.711,34.061 80.471,34.061 80.441,34.091 80.441,34.367 80.411,34.397 80.171,34.397 80.141,34.367 80.141,34.091 80.111,34.061 79.871,34.061 79.841,34.091 79.841,34.367 79.811,34.397 79.571,34.397 79.541,34.367 79.541,34.091 79.511,34.061 79.271,34.061 79.241,34.091 79.241,34.367 79.211,34.397 78.971,34.397 78.941,34.367 78.941,34.091 78.911,34.061 78.671,34.061 78.641,34.091 78.641,34.367 78.611,34.397 78.371,34.397 78.341,34.367 78.341,34.091 78.311,34.061 78.071,34.061 78.041,34.091 78.041,34.367 78.011,34.397 77.771,34.397 77.741,34.367 77.741,34.091 77.711,34.061 77.471,34.061 77.441,34.091 77.441,34.367 77.411,34.397 77.171,34.397 77.141,34.367 77.141,34.259 77.083,34.2 76.872,34.2 76.859,34.2 76.8,34.141 76.8,33.9 77,33.7 81.7,33.7 81.9,33.9 81.9,35.641 81.843,35.699 81.841,35.7 81.767,35.7 81.709,35.759 81.709,35.92 81.679,35.95 81.439,35.95 81.409,35.92 81.409,35.653 81.379,35.623 81.139,35.623 81.109,35.653 81.109,35.92 81.079,35.95 80.839,35.95 80.809,35.92 80.809,35.653 80.779,35.623 80.539,35.623 80.509,35.653 80.509,35.92 80.479,35.95 80.239,35.95 80.209,35.92 80.209,35.653 80.179,35.623 79.939,35.623 79.909,35.653 79.909,35.92 79.879,35.95 79.639,35.95 79.609,35.92 79.609,35.653 79.579,35.623 79.339,35.623 79.309,35.653 79.309,35.92 79.279,35.95 79.039,35.95 79.009,35.92 79.009,35.653 78.979,35.623 78.739,35.623 78.709,35.653 78.709,35.92 78.679,35.95 78.439,35.95 78.409,35.92 78.409,35.759 78.35,35.7 78.3,35.7 v1(78,35.7)